# Altium PCB AD603.PcbDoc
Units mil, origin at the board's own origin, x right, y up, seen from the top; angles counter-clockwise.
Board outline 6000 x 4000 mil, 2 copper layers (Top Layer, Bottom Layer); 39 components, 14 nets, 100 pads, 0 vias.
Unrouted connection lines stored in the file: 1.
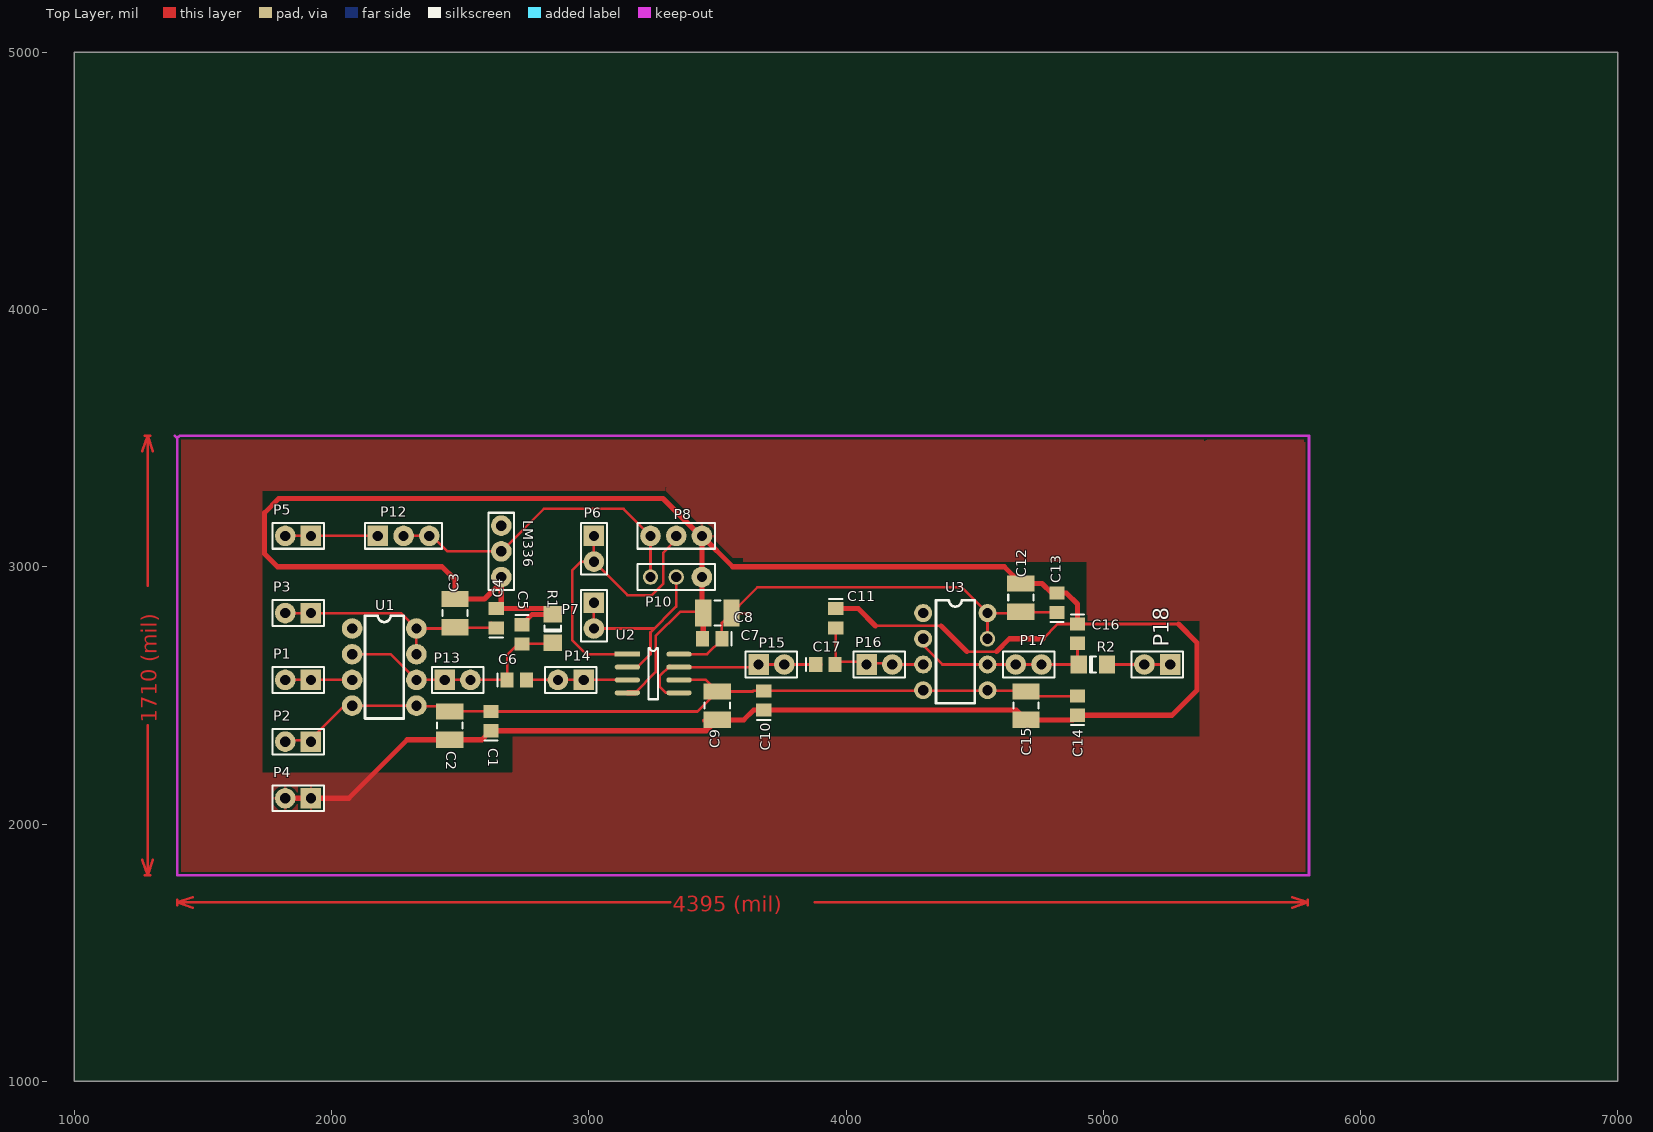
[diagram p0: Top Layer view]
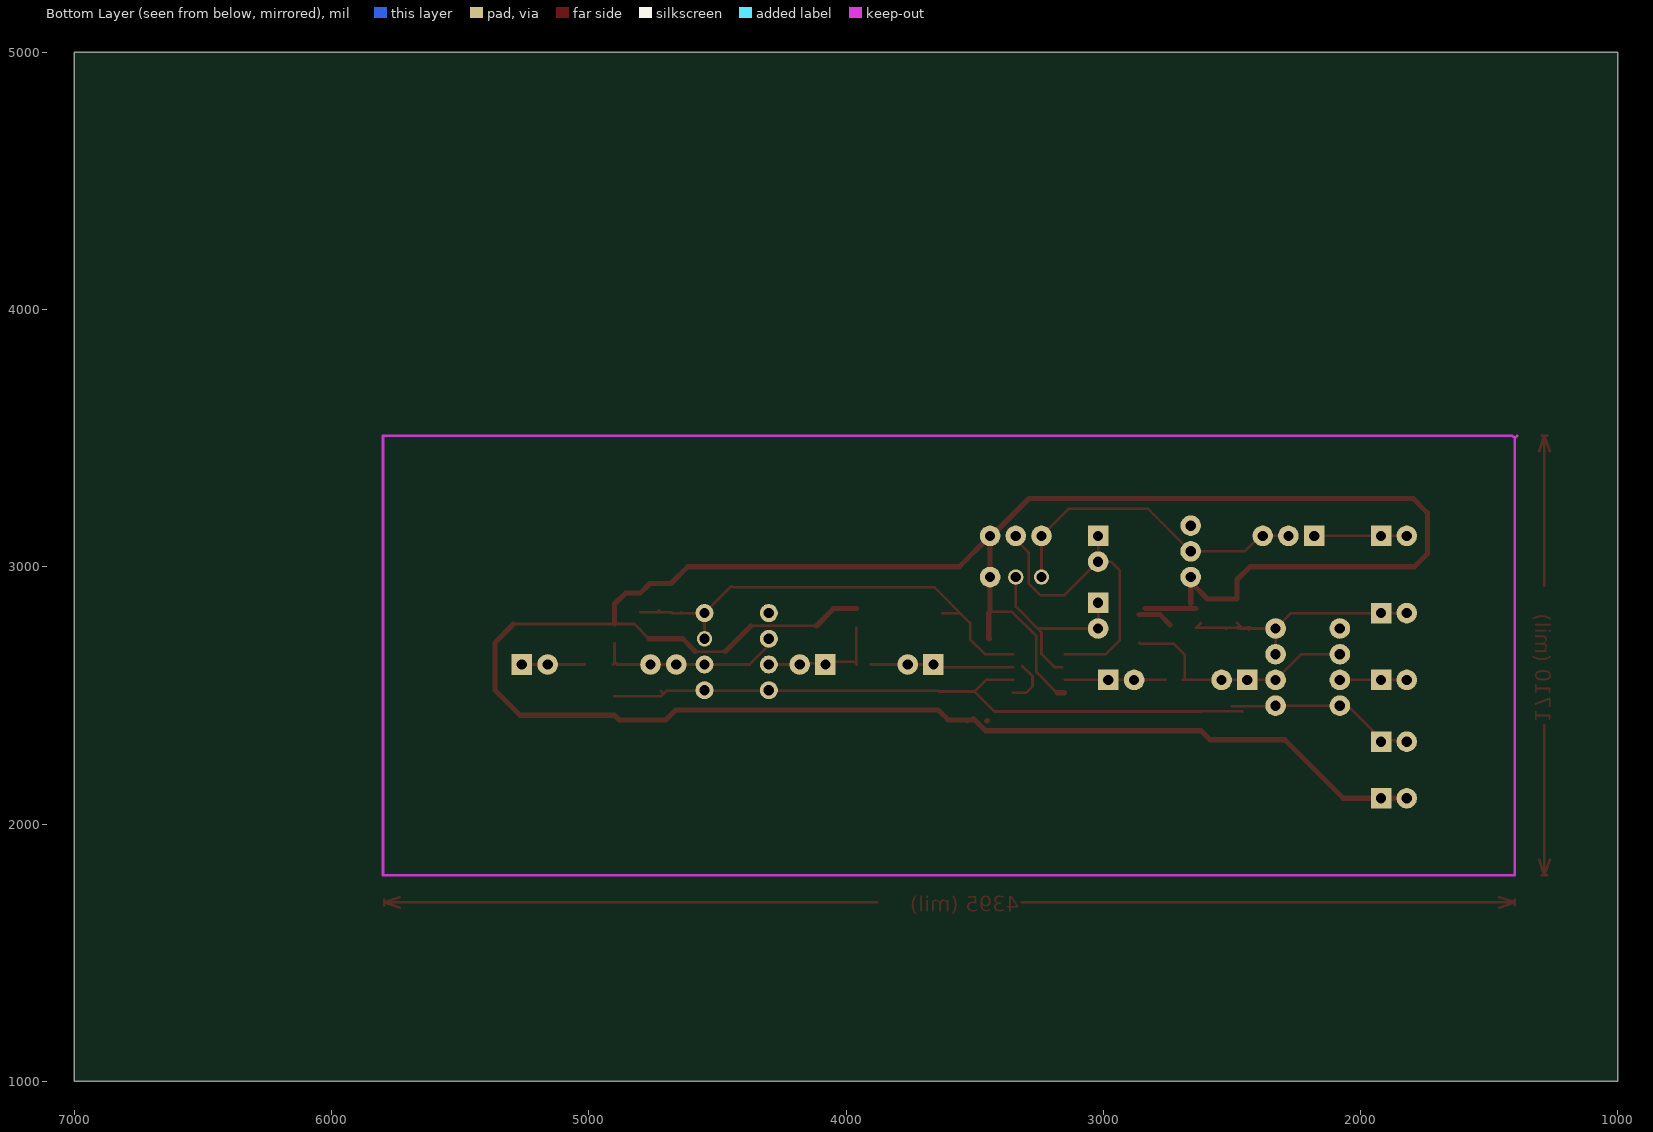
[diagram p1: Bottom Layer view, seen from below]

## Layer stack, top to bottom
Top Layer: signal copper 1.4
Dielectric: dielectric 12.6, FR-4, Dk 4.8
Bottom Layer: signal copper 1.4

## Board outline
1000,1000 7000,1000 7000,5000 1000,5000

## Design rules (kind name [scope] priority, off if disabled: settings)
Clearance [All] p1: gap=10
ComponentClearance [All] p1: gap=10 collisioncheckmode=0
PolygonConnect [All] p1: connectstyle=Relief reliefconductorwidth=10 reliefentries=4 polygonreliefangle="90 Angle"
RoutingVias [All] p1: holewidth=28 width=50 viastyle="Through Hole" minholewidth=28 minwidth=50 maxholewidth=28 maxwidth=50
SolderMaskExpansion [All] p1: expansion=4
TestPointUsage [All] p1: valid=0 allowmultiple=FALSE
Testpoint [All] p1: side=15 testpointundercomponent=TRUE minsize=40 maxsize=100 preferedsize=60 minholesize=0 maxholesize=40 preferedholesize=32 testpointgrid=1 style=1023 order=-539222988
Width [InNet('GND')] p1: maxlimit=20 minlimit=10 preferedwidth=10 minimp=50.000000 maximp=50.000000 favimp=50.000000
17 further rules are at their usual default settings.

## Components (designator, comment, footprint, x,y, rotation, side; value= is the part's Value field where it differs from the comment)
C1 "" CC2012-0805 2620,2400 r90 top
C2 "" CR3225-1210 2460,2382.6 r90 top
C3 "" CR3225-1210 2480,2820 r90 top
C4 "" CC2012-0805 2640,2800 r90 top
C5 "" CC2012-0805 2740,2737.4 r270 top
C6 "" CC2012-0805 2720,2560 r0 top
C7 "" CR3225-1210 3500,2820 r180 top
C8 "" CC2012-0805 3480,2720 r180 top
C9 "" CR3225-1210 3500,2460 r90 top
C10 "" CC2012-0805 3680,2480 r90 top
C11 "" CC2012-0805 3960,2800 r270 top
C12 "" CR3225-1210 4680,2880 r90 top
C13 "" CC2012-0805 4820,2860 r90 top
C14 "" CC2012-0805 4900,2460 r90 top
C15 "" CR3225-1210 4700,2460 r90 top
C16 "" CC2012-0805 4900,2740 r270 top
C17 "" CC2012-0805 3920,2620 r0 top
LM336 "" HDR1X3#1 2660,2960 r90 top
P1 "" HDR1X2#1 1920,2560 r180 top
P2 "" HDR1X2#1 1920,2320 r180 top
P3 "" HDR1X2#1 1920,2820 r180 top
P4 "" HDR1X2#1 1920,2100 r180 top
P5 "" HDR1X2#1 1920,3120 r180 top
P6 "" HDR1X2#1 3020,3120 r270 top
P7 "" HDR1X2#1 3020,2860 r270 top
P8 "" HDR1X3#1 3240,3120 r0 top
P10 "" HDR1X3#2 3240,2960 r0 top
P12 "" HDR1X3#3 2180,3120 r0 top
P13 "" HDR1X2#1 2440,2560 r0 top
P14 "" HDR1X2#1 2980,2560 r180 top
P15 "" HDR1X2#1 3660,2620 r0 top
P16 "" HDR1X2#1 4080,2620 r0 top
P17 "" HDR1X2#2 4660,2620 r0 top
P18 "" HDR1X2#1 5260,2620 r180 top
R1 "" CC3216-1206 2860,2760 r90 top
R2 "" CC3216-1206 4960,2620 r0 top
U1 "OPA642" DIP-8#1 2280,3260 r0 top
U2 "AD603" SO-8 3150,2660 r0 top
U3 "OPA642" DIP-8#2 4500,3320 r0 top

## Footprints (in the part's own frame and the unit in brackets; to place one, negate y for a bottom-side part, rotate by r counter-clockwise, add the part's x,y. Pads: shape width x height; smd on the part's side, far side on the other; paste and mask are expansions set on the pad)
CC2012-0805 [mm] "Chip Capacitor; Body 2.0 x 1.2 mm (LxW typ)"
  rect 1.3x1.5 smd: 1(-0.95,0) 2(0.95,0)
  silkscreen extent -1.9,-0.65 -1.9,0.65
CC3216-1206 [mm] "Chip Capacitor; Body 3.2 x 1.6 mm (LxW typ)"
  rect 1.6x1.8 smd: 1(-1.4,0) 2(1.4,0)
  silkscreen extent -0.3,-0.8 0.3,0.8
CR3225-1210 [mm] "Chip Resistor; Body 3.2 x 2.5 mm (LxW typ)"
  rect 1.6x2.7 smd: 1(-1.4,0) 2(1.4,0)
  silkscreen extent -0.3,-1.25 0.3,1.25
DIP-8#1 [mil]
  round 80 hole 40: 1(-200,-500) 2(-200,-600) 3(-200,-700) 4(-200,-800) 5(50,-800) 6(50,-700) 7(50,-600) 8(50,-500)
  silkscreen extent -150,-850 0,-450
DIP-8#2 [mil]
  round 70 hole 40: 1(-200,-500) 2(-200,-600) 3(-200,-700) 4(-200,-800) 5(50,-800) 6(50,-700) 8(50,-500)
  round 60 hole 40: 7(50,-600)
  silkscreen extent -150,-850 0,-450
HDR1X2#1 [mil] "Connector; Header; 2 Position"
  rect 80x80 hole 40: 1(0,0)
  round 80 hole 40: 2(100,0)
  silkscreen extent -50,-50 150,50
HDR1X2#2 [mil] "Connector; Header; 2 Position"
  round 80 hole 40: 1(0,0) 2(100,0)
  silkscreen extent -50,-50 150,50
HDR1X3#1 [mil] "Connector; Header; 3 Position"
  round 80 hole 40: 1(0,0) 2(100,0) 3(200,0)
  silkscreen extent -50,-50 250,50
HDR1X3#2 [mil] "Connector; Header; 3 Position"
  round 60 hole 40: 1(0,0) 2(100,0)
  round 80 hole 40: 3(200,0)
  silkscreen extent -50,-50 250,50
HDR1X3#3 [mil] "Connector; Header; 3 Position"
  rect 80x80 hole 40: 1(0,0)
  round 80 hole 40: 2(100,0) 3(200,0)
  silkscreen extent -50,-50 250,50
SO-8 [mm]
  rect 2.5x0.49 smd: 1(0,0)
  oval 2.5x0.49 smd: 2(0,-1.27) 3(0,-2.54) 4(0,-3.81) 5(5.1,-3.81) 6(5.1,-2.54) 7(5.1,-1.27) 8(5.1,0)
  silkscreen extent 2.08,-4.44 3.02,0.64

## Part data
C1 C3 C6 C7 C9 C12 C14 C17: library part "Cap Semi", "Capacitor (Semiconductor SIM Model)"
C2 C4 C8 C10 C13 C15: library part Cap2, "Capacitor"
C5 C11 C16: library part Cap, "Capacitor"
LM336 P8 P10 P12: library part "Header 3", "Header, 3-Pin"
P1 P2 P3 P4 P5 P6 P7: library part "Header 2", "Header, 2-Pin"
P13 P14 P15 P16 P17 P18: library part "Header 2H", "Header, 2-Pin, Right Angle"
R1 R2: library part Res2, "Resistor"

## Nets (pads, with @x,y where several pads share a name; then routed paths per layer and width w, separated by ;. In a path a pad name is that pad's centre, name@x,y a point inside that pad or via, vN(x,y) a via of type N, cw(c..) or ccw(c..) an arc to the next point about the centre after c; other vN are vias at no path point)
10V: P5.1 P5.2 P12.1 | length 360
  Top Layer w10: P5.2 P12.1
GND: C1.1 C2.1 C3.2 C4.2 C5.1 C7.2 C8.2 C9.1 C10.1 C11.1 C12.2 C13.2 C14.1 C15.1 C16.1 LM336.1 P4.1 P4.2 P8.3 P10.3 R1.2 U2.4 | length 11494.3
  Top Layer w10: U2.4@3180,2510 3260,2590 3260,2730 3354.88,2824.88 C7.2@3440,2824.88 ; 4115,2770 4370,2770 ; 4470,2670 4585,2670 ; 4765,2720 4822.4,2777.4 5292.6,2777.4
  Top Layer w20: P4.2 2066.72,2100 2294.2,2327.48 2584.88,2327.48 C1.1 3457.6,2362.6 C9.1@3505,2410 ; C4.2 R1.2@2837.72,2837.4 ; C4.2@2660,2857.4 LM336.1 ; LM336.1@2660,2940 2595.12,2875.12 C3.2 2480,2950 2430,3000 1790,3000 1740,3050 1740,3210 1795,3265 3289.08,3265 3434.08,3120 P8.3 ; C5.1 2780.32,2815.12 R1.2 ; U2.4 U2.4@3180,2510 ; C8.2 3444.88,2722.28 C7.2 3440,2824.88 P8.3 ; C9.1@3450,2402.6 C9.1@3452.6,2400 ; C9.1 3602.28,2404.88 3640,2442.6 4662.28,2442.6 C15.1 4882.28,2404.88 C14.1 5267.6,2422.6 5365,2520 5365,2705 5292.6,2777.4 ; C9.1@3527.4,2400 C9.1@3530,2402.6 ; C11.1 4047.6,2837.4 4115,2770 ; 4370,2770 4470,2670 ; 4585,2670 4635,2720 4765,2720 ; C16.1 4900,2855 4857.6,2897.4 4800,2897.4 4762.28,2935.12 C12.2 4615.12,3000 3560,3000 P8.3
NetLM336_2: LM336.2 P8.1 P10.1 P12.2 P12.3 | length 1263.8
  Top Layer w10: P12.2 P12.3@2390,3120 ; P12.3@2395,3115 P12.3@2390,3120 ; P10.1 P8.1 3135,3225 2825,3225 LM336.2 2450,3060 P12.3@2390,3120
VCC: C3.1 C4.1 C7.1 C8.1 C12.1 C13.1 P3.1 P3.2 U1.7 U1.8 U2.8 U3.7 U3.8 | length 2935.6
  Top Layer w10: P3.2 2270,2820 U1.8 ; U1.7 U1.8 ; C3.1@2430,2760 C3.1@2435,2755 ; C3.1@2430,2765 2437.6,2765 C3.1@2440,2762.6 ; C3.1@2437.4,2760 C3.1@2440,2762.6 ; C3.1@2457.72,2760 C3.1@2480,2782.28 ; C3.1@2522.6,2760 2520,2762.6 C3.1@2440,2762.6 ; C4.1@2620.31,2782.28 C4.1 2482.28,2762.6 C3.1 2475.12,2760 U1.8 ; U2.8 3460,2660 C8.1@3517.4,2717.4 ; C8.1 3517.4,2782.28 3655,2919.88 4439.88,2919.88 4445,2925 U3.8 ; C7.1 3625,2820 ; U3.7 U3.8 ; C12.1@4637.4,2820 C12.1@4640,2822.6 ; C12.1@4720,2822.6 C12.1@4727.4,2830 ; C13.1@4800,2822.6 4677.72,2822.6 4675.12,2820 U3.8
VEE: C1.2 C2.2 C9.2 C10.2 C14.2 C15.2 P2.1 P2.2 U1.4 U1.5 U2.6 U3.4 U3.5 | length 3408.5
  Top Layer w10: P2.2@1815,2325 1915,2325 2050,2460 U1.5 2332.6,2457.4 C2.2@2500,2457.4 ; C2.2@2460.32,2437.4 C2.2 2619.68,2437.72 C1.2 3422.28,2437.4 C9.2 ; U2.6 3455.12,2560 C9.2 ; U3.5 U3.5@4552.6,2517.4 ; C15.2@4710,2510 4712.6,2510 C15.2@4720,2517.4 ; C14.2 4717.72,2497.4 4697.72,2517.4 4297.4,2517.4 3640,2517.4 3637.72,2515.12 C9.2
VI: P1.1 P1.2 U1.3 | length 260
  Top Layer w10: P1.2 U1.3
VI1: C5.2 C6.1 P13.1 P13.2 R1.1 U1.2 U1.6 | length 946
  Top Layer w10: U1.2 2230,2660 U1.6 C6.1@2690,2560 ; C6.1 2682.6,2657.6 2725,2700 2855.12,2700 R1.1
VI2: C6.2 P14.1 P14.2 U2.3 | length 392.6
  Top Layer w10: C6.2 U2.3
VI3: C17.1 P15.1 P15.2 U2.5 U2.7 | length 739.3
  Top Layer w10: U2.7@3315,2615 3275,2575 3275,2535 3300,2510 U2.5 ; U2.7 3650,2610 P15.1 C17.1@3903.19,2620
VI4: C11.2 C17.2 P16.1 P16.2 U3.3 | length 489.9
  Top Layer w10: C17.2 3960,2622.6 C11.2 ; C17.2@3960,2630 4070,2630 P16.1 ; P16.1@4080,2625 4180,2625 4185,2620 U3.3
VI5: C16.2 P17.1 P17.2 R2.1 U3.2 U3.6 | length 737.8
  Top Layer w10: U3.2 4300,2695 4375,2620 P17.1 4890,2620 R2.1@4895,2625 ; C16.2 4900,2624.88 R2.1
VN: P7.1 P7.2 P10.2 U2.2 | length 777.1
  Top Layer w10: P7.1 P7.2 3255,2760 ; U2.2@3160,2610 3190,2610 3240,2660 3240,2745 3340,2845 P10.2
VO: P18.1 P18.2 R2.2 | length 244.9
  Top Layer w10: R2.2 P18.1
VP: P6.1 P6.2 P8.2 U2.1 | length 1255.5
  Top Layer w10: P6.1 P6.2 ; U2.1 2990,2660 2935,2715 2935,2985 2970,3020 P6.2 ; P8.2 3340,3105 3290,3055 3290,2935 3245,2890 3150,2890 P6.2
pads on no net: LM336.3 U1.1 U3.1
copper on no net: | length 5587.3
  Top Layer w10: 1265,1860 1285,1800 ; 1265,3450 1285,3510 ; 1275,1800 1295,1800 ; 1275,3510 1295,3510 ; 1285,2384.08 1285,1800 ; 1285,2925.92 1285,3510 ; 1305,1860 1285,1800 ; 1305,3450 1285,3510 ; 1400,1685 1400,1705 ; 1460,1675 1400,1695 ; 1460,1715 1400,1695 ; 3316.59,1695 1400,1695 ; 3878.41,1695 5795,1695 ; 5735,1675 5795,1695 ; 5735,1715 5795,1695 ; 5795,1685 5795,1705

## Polygon pours and split planes (outlines as drawn)
GND on Top Layer (solid): 3275,3500 3275,3310 3820,3310 3820,3500
GND on Top Layer (solid): 3585,3310 3295,3310 3300,3305 3800,3305 3800,3315
GND on Top Layer (solid): 1675,3440 1675,3295 1745,3295 1745,3435 1665,3435
GND on Top Layer (solid): 1715,3295 3295,3295 3295,3495 1695,3495
GND on Top Layer (solid): 3805,3495 3805,3305 5390,3305 5390,3495
GND on Top Layer (solid): 5785,3485 5755,3485 5755,3305 5785,3305
GND on Top Layer (solid): 5405,3495 5780,3495 5780,3325 5385,3325 5385,3485
GND on Top Layer (solid): 5395,3325 5795,3325 5795,2175 5375,2175 5375,3495
GND on Top Layer (solid): 4935,3020 4935,2790 5405,2790 5405,3040 4910,3040
GND on Top Layer (solid): 1700,3295 1730,3295 1730,2200 1700.05,2200
GND on Top Layer (solid): 2705,2205 2705,2340 5400,2340 5400,2190 2700,2190
GND on Top Layer (solid): 3300,3295 3560,3035 3605,3035 3605,3305 3300,3305
GND on Top Layer (solid): 3600,3295 3600,3020 5405,3020 5405,3310 3595,3310
GND on Top Layer (solid): 1700,2200 5805,2200 5805,1815 1705,1815
GND on Top Layer (solid): 1400,3505 1400,1800 1705,1800 1705,3505

## Keep-outs
Keep-Out Layer:
  lines w10: 1390,3510 1400,3500 ; 1400,3380 1400,3500 ; 1400,3395 1400,1800 2305,1800 5800,1800 5800,3000 ; 5800,2990 5800,3510 1410,3510 1405,3505 1400,3500

## Other copper
Top Layer:
  text "1710 (mil)" at 1320.99,2394.08 h60 r90
  text "4395 (mil)" at 3326.59,1659.01 h60